# EAGLE board i (EAGLE 7.2.0)
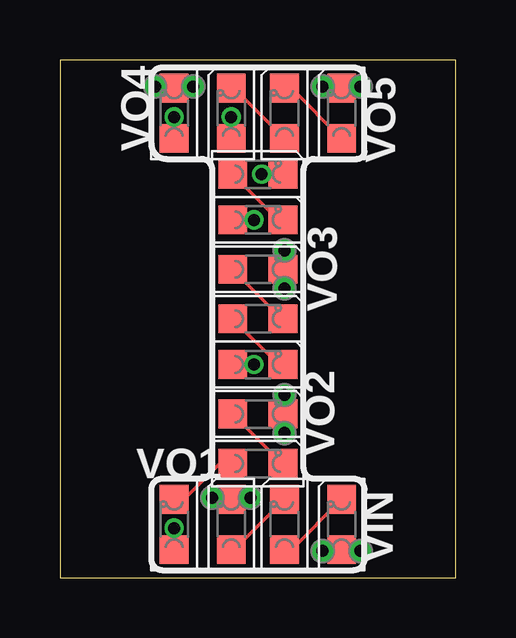
[diagram p0: board, top side]
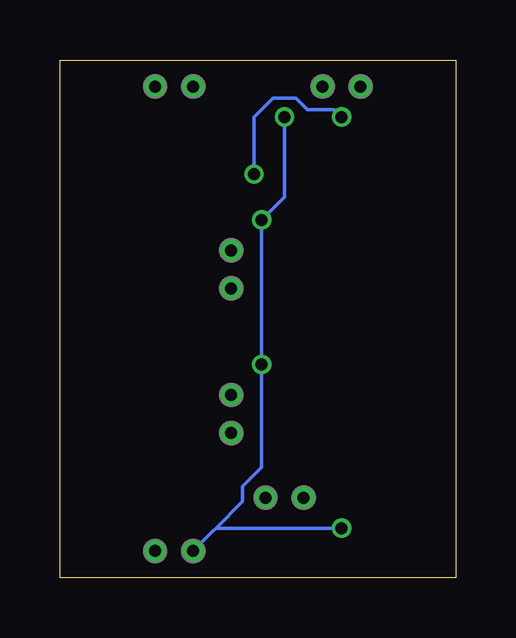
[diagram p1: board, bottom side, seen from below]

Size 16.51 x 21.59 mm. Coordinates in mm from the lower left corner, seen from the top.
Outline: 0,0 16.51,0 16.51,21.59 0,21.59 0,0
Copper layers (1*16): Top 0.035mm / dielectric 1.5mm / Bottom 0.035mm
Design rules "Fusion_eagle_rule_v1.1_tms *": minimum track width 6mil, minimum drill 12mil, track to track 6mil, track to pad 6mil, pad to pad 6mil, via to via 6mil, smd to smd 0mil, copper to edge 10mil, drill to drill 10mil, minimum pad ring 10mil, minimum via ring 6mil, stop-mask expansion 2mil, vias tented up to drill 100mil, thermal gap 10mil

## Footprints (pad centres in the part's own frame; a part is rotated, then mirrored left to right if it is on the bottom)
LED_0805 = smd 1.2 x 1.2: A 0,-1.05; C 0,1.05
P1-20 = drill 0.5: TP 0,0

## Placement (x,y rotation side)
LED1  [LED_0805]  11.75,2.22 0 top
LED2  [LED_0805]  9.37,2.22 0 top
LED3  [LED_0805]  7.14,2.22 0 top
LED4  [LED_0805]  4.76,2.22 0 top
LED5  [LED_0805]  8.26,4.76 270 top
LED6  [LED_0805]  8.26,6.83 270 top
LED7  [LED_0805]  8.26,8.89 270 top
LED8  [LED_0805]  8.26,10.79 270 top
LED9  [LED_0805]  8.26,12.86 270 top
LED10  [LED_0805]  8.26,14.92 270 top
LED11  [LED_0805]  8.26,16.83 270 top
LED12  [LED_0805]  4.76,19.37 0 top
LED13  [LED_0805]  7.14,19.37 0 top
LED14  [LED_0805]  9.37,19.37 0 top
LED15  [LED_0805]  11.75,19.37 0 top
VIN  [P1-20]  10.95,1.11 0 top
VIN1  [P1-20]  12.54,1.11 0 top
VO1  [P1-20]  7.94,3.33 0 top
VO2  [P1-20]  9.37,6.03 0 top
VO3  [P1-20]  9.37,12.06 0 top
VO4  [P1-20]  3.97,20.48 0 top
VO5  [P1-20]  10.95,20.48 0 top
VO6  [P1-20]  6.35,3.33 0 top
VO7  [P1-20]  9.37,7.62 0 top
VO8  [P1-20]  9.37,13.65 0 top
VO9  [P1-20]  5.56,20.48 0 top
VO10  [P1-20]  12.54,20.48 0 top

## Library data of the parts
LED1-LED15 VIN VIN1 VO1-VO10 = CyberRailGuru

## Nets
N$3: LED2.C LED3.A
N$4: LED1.C LED2.A
N$7: LED5.C LED6.A
N$8: LED4.C LED5.A
N$11: LED8.C LED9.A
N$12: LED7.C LED8.A
N$15: LED11.C LED12.A
N$16: LED10.C LED11.A
N$19: LED14.C LED15.A
N$20: LED13.C LED14.A
VIN: LED1.A LED4.A LED7.A LED10.A LED13.A VIN1.TP VIN.TP
VOUT1: LED3.C VO1.TP VO6.TP
VOUT2: LED6.C VO2.TP VO7.TP
VOUT3: LED9.C VO3.TP VO8.TP
VOUT4: LED12.C VO4.TP VO9.TP
VOUT5: LED15.C VO5.TP VO10.TP

## Tracks (layer width: path | path; a pad name or v marks a point on that pad's centre or on a via)
N$3
  Top 0.152: LED3.A 7.27,1.17 LED2.C
N$4
  Top 0.152: LED2.A 9.65,1.17 LED1.C
N$7
  Top 0.152: LED5.C 9.27,4.76 LED6.A
N$8
  Top 0.152: LED4.C 5.18,3.27 6.67,4.76 LED5.A
N$11
  Top 0.152: LED8.C 9.27,10.79 LED9.A
N$12
  Top 0.152: LED7.C 9.11,8.89 LED8.A
N$15  (via drill 0.5)
  Top 0.152: LED11.C v8.41,16.83 | v4.76,19.21 LED12.A
  Bottom 0.152: v8.41,16.83 8.41,19.21 7.62,20 6.67,20 6.19,19.53 5.08,19.53 v4.76,19.21
N$16
  Top 0.152: LED10.C 9.11,14.92 LED11.A
N$19
  Top 0.152: LED14.C 9.65,20.42 LED15.A
N$20
  Top 0.152: LED13.C 7.27,20.42 LED14.A
VIN  (via drill 0.5)
  Top 0.152: VIN.TP 11.69,1.11 LED1.A 11.81,1.11 VIN1.TP | LED13.A v7.14,19.21 | v8.1,14.92 LED10.A | LED7.A v8.1,8.89 | LED4.A v4.76,2.06
  Bottom 0.152: v7.14,19.21 7.14,15.88 v8.1,14.92 v8.1,8.89 8.1,4.6 8.89,3.81 8.89,3.17 10,2.06 | v4.76,2.06 10,2.06 | 10,2.06 10.16,1.91 VIN.TP
VOUT1
  Top 0.152: VO6.TP 7.08,3.33 LED3.C 7.21,3.33 VO1.TP
VOUT2
  Top 0.152: VO7.TP 9.37,6.89 LED6.C 9.37,6.76 VO2.TP
VOUT3
  Top 0.152: VO8.TP 9.37,12.92 LED9.C 9.37,12.8 VO3.TP
VOUT4
  Top 0.152: VO4.TP 4.7,20.48 LED12.C 4.82,20.48 VO9.TP
VOUT5
  Top 0.152: VO5.TP 11.69,20.48 LED15.C 11.81,20.48 VO10.TP

## Text on the board
201bmp: I